# Altium PCB PCB1.PcbDoc
Units mm, origin at the board's own origin, x right, y up, seen from the top; angles counter-clockwise.
Board outline 56.5 x 48.5 mm, 2 copper layers (Top Layer, Bottom Layer); 33 components, 38 nets, 148 pads, 52 vias.
Unrouted connection lines stored in the file: 3.
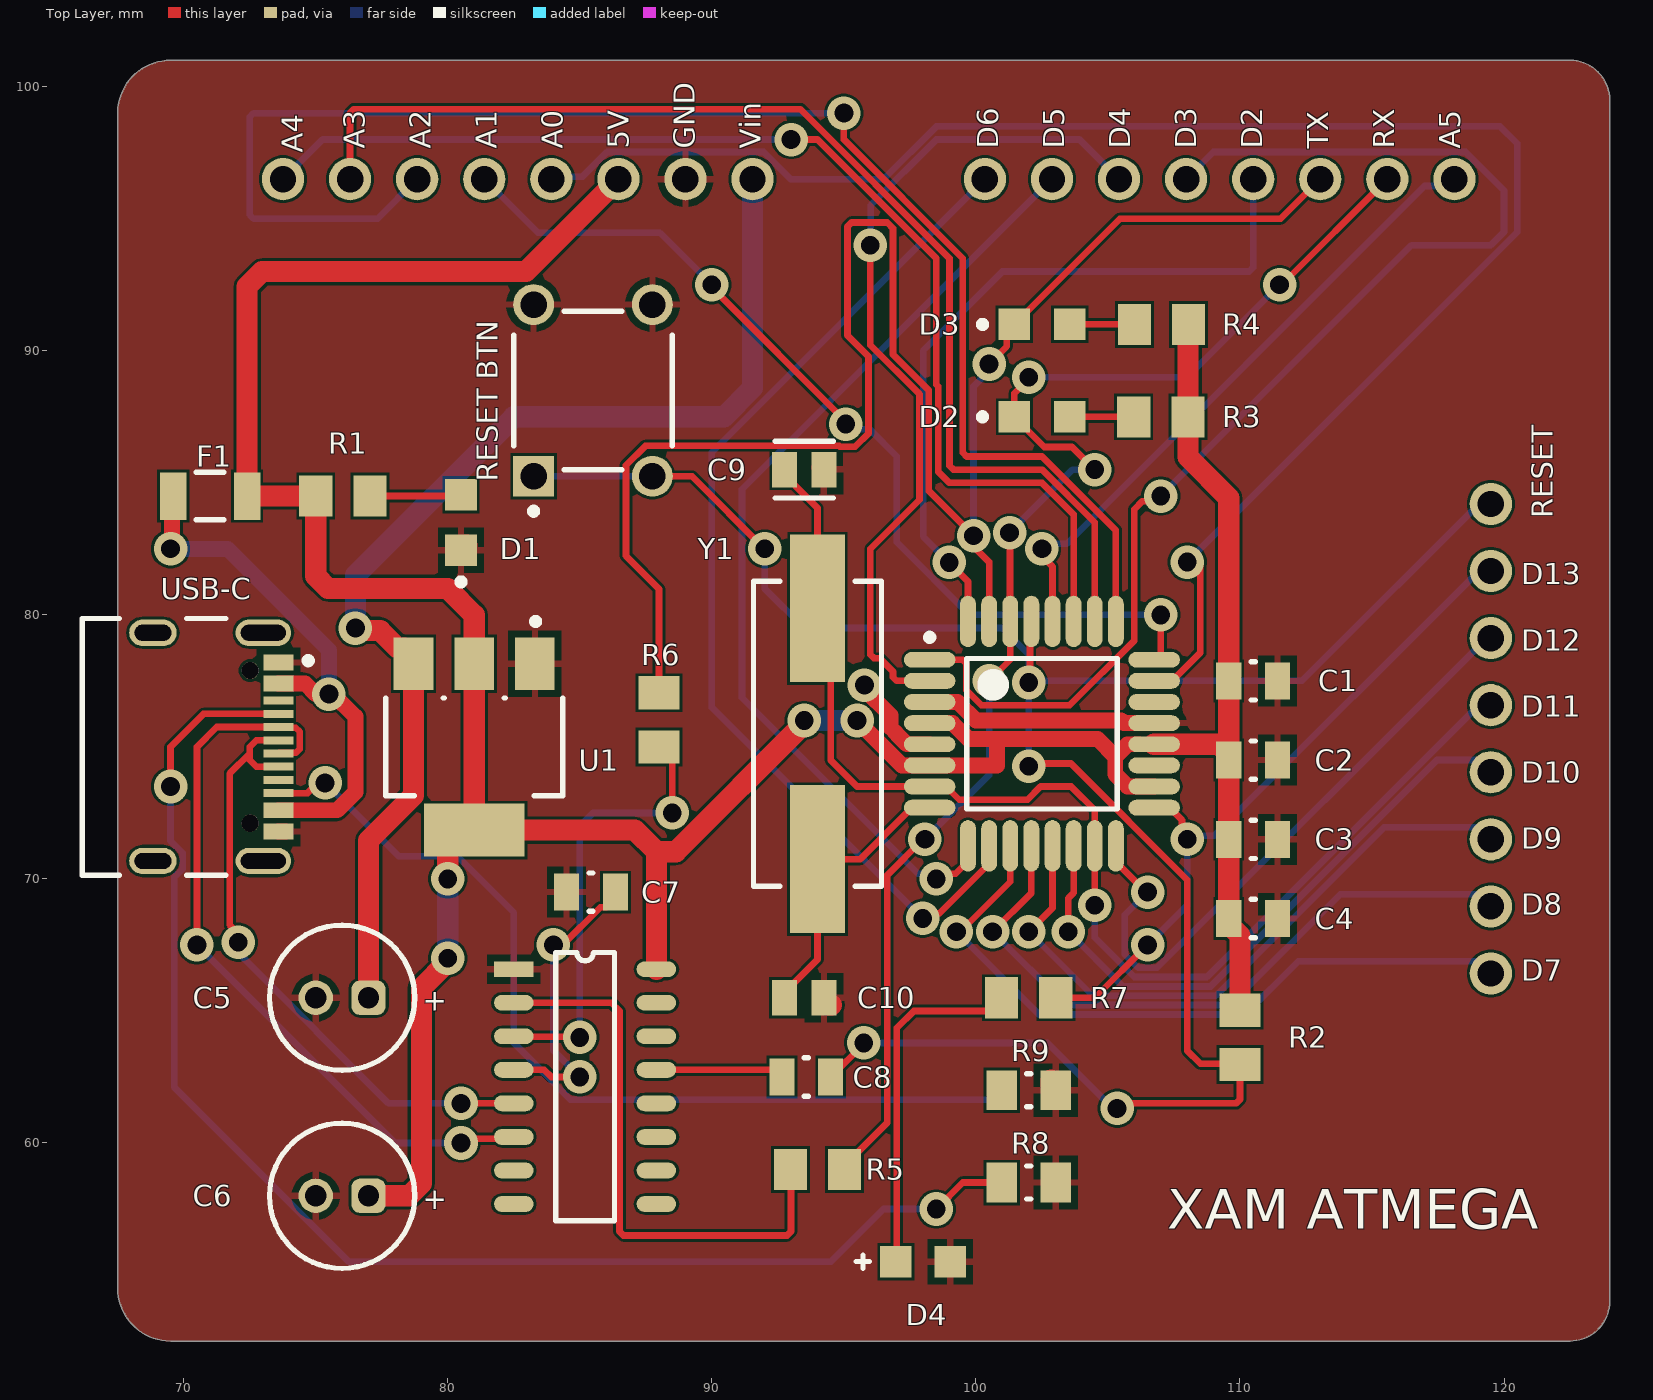
[diagram p0: Top Layer view]
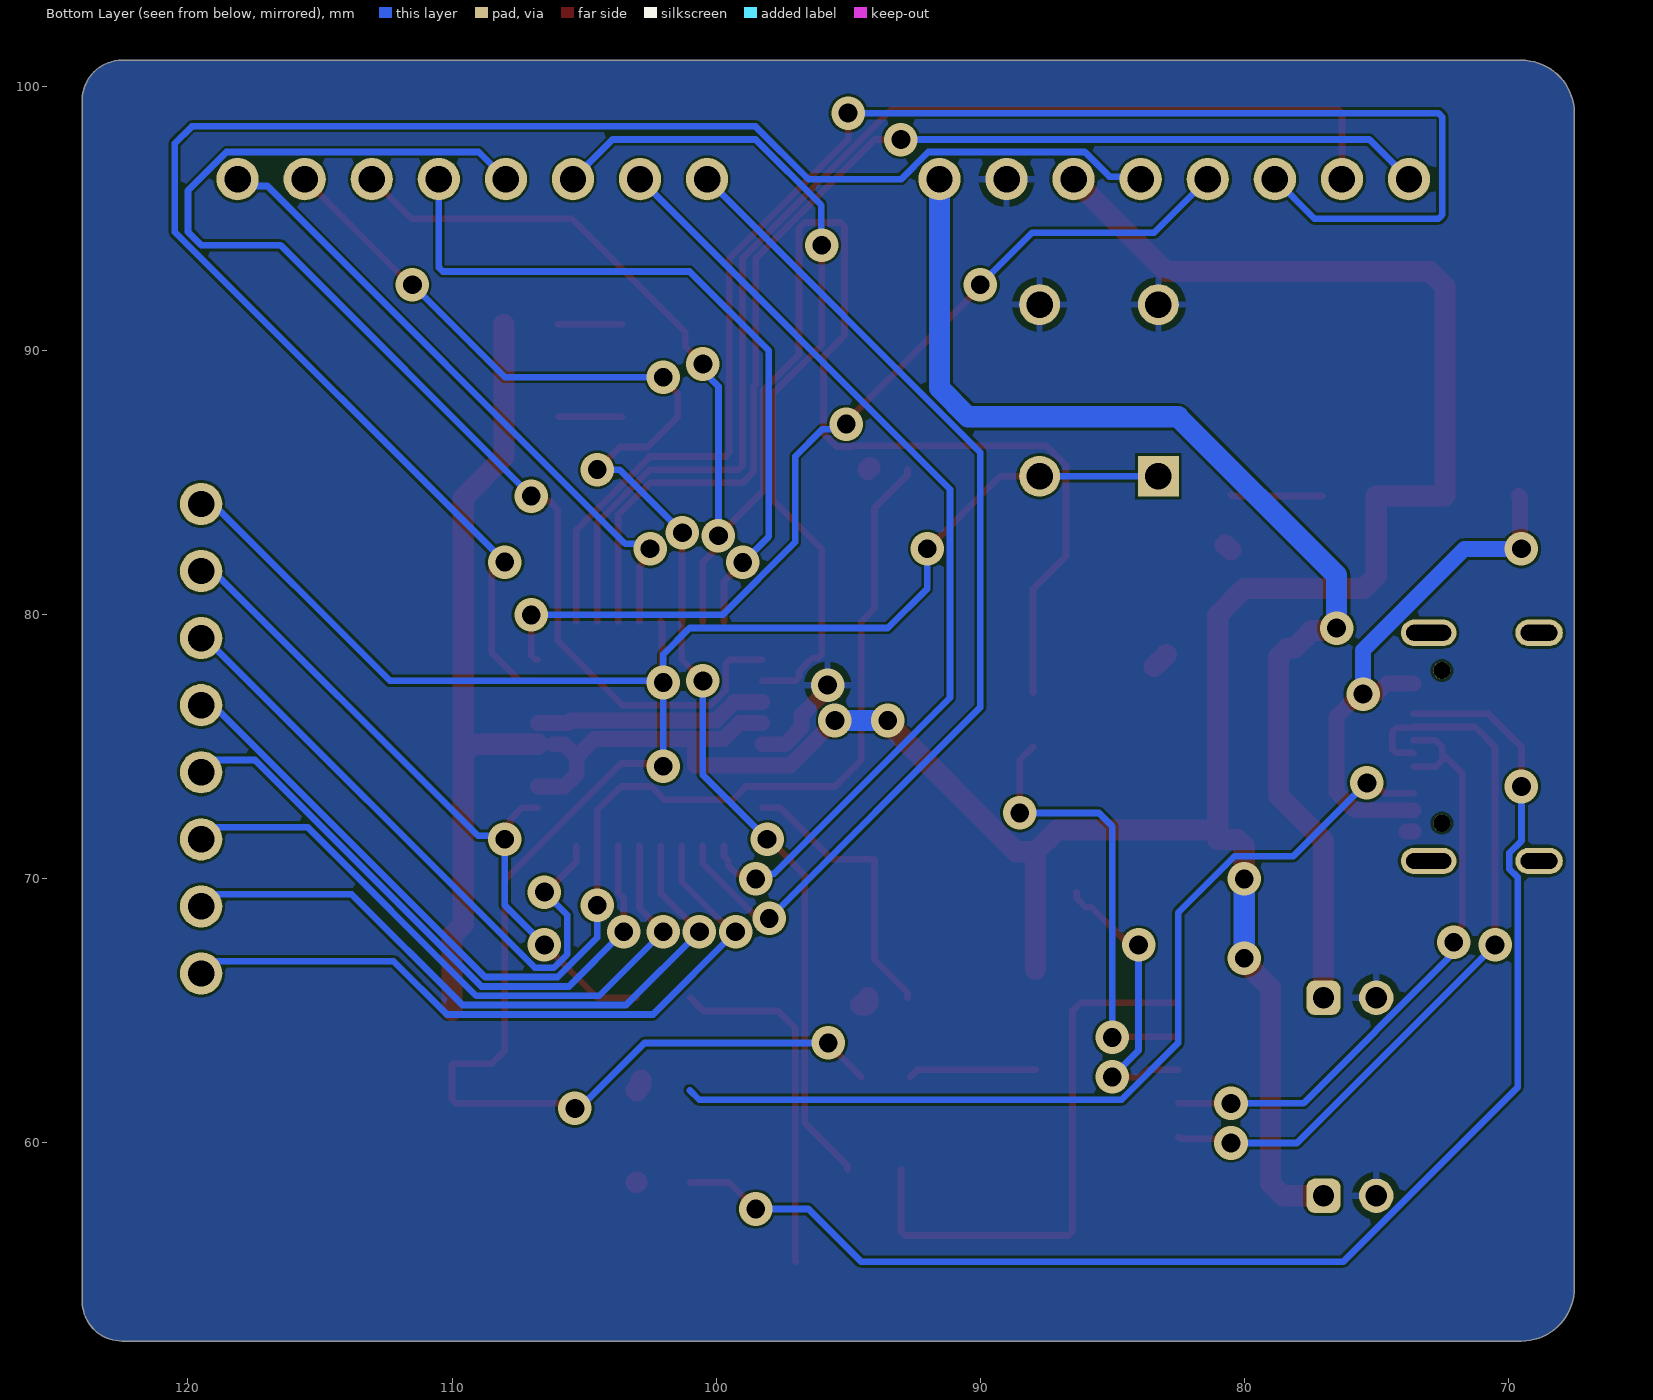
[diagram p1: Bottom Layer view, seen from below]
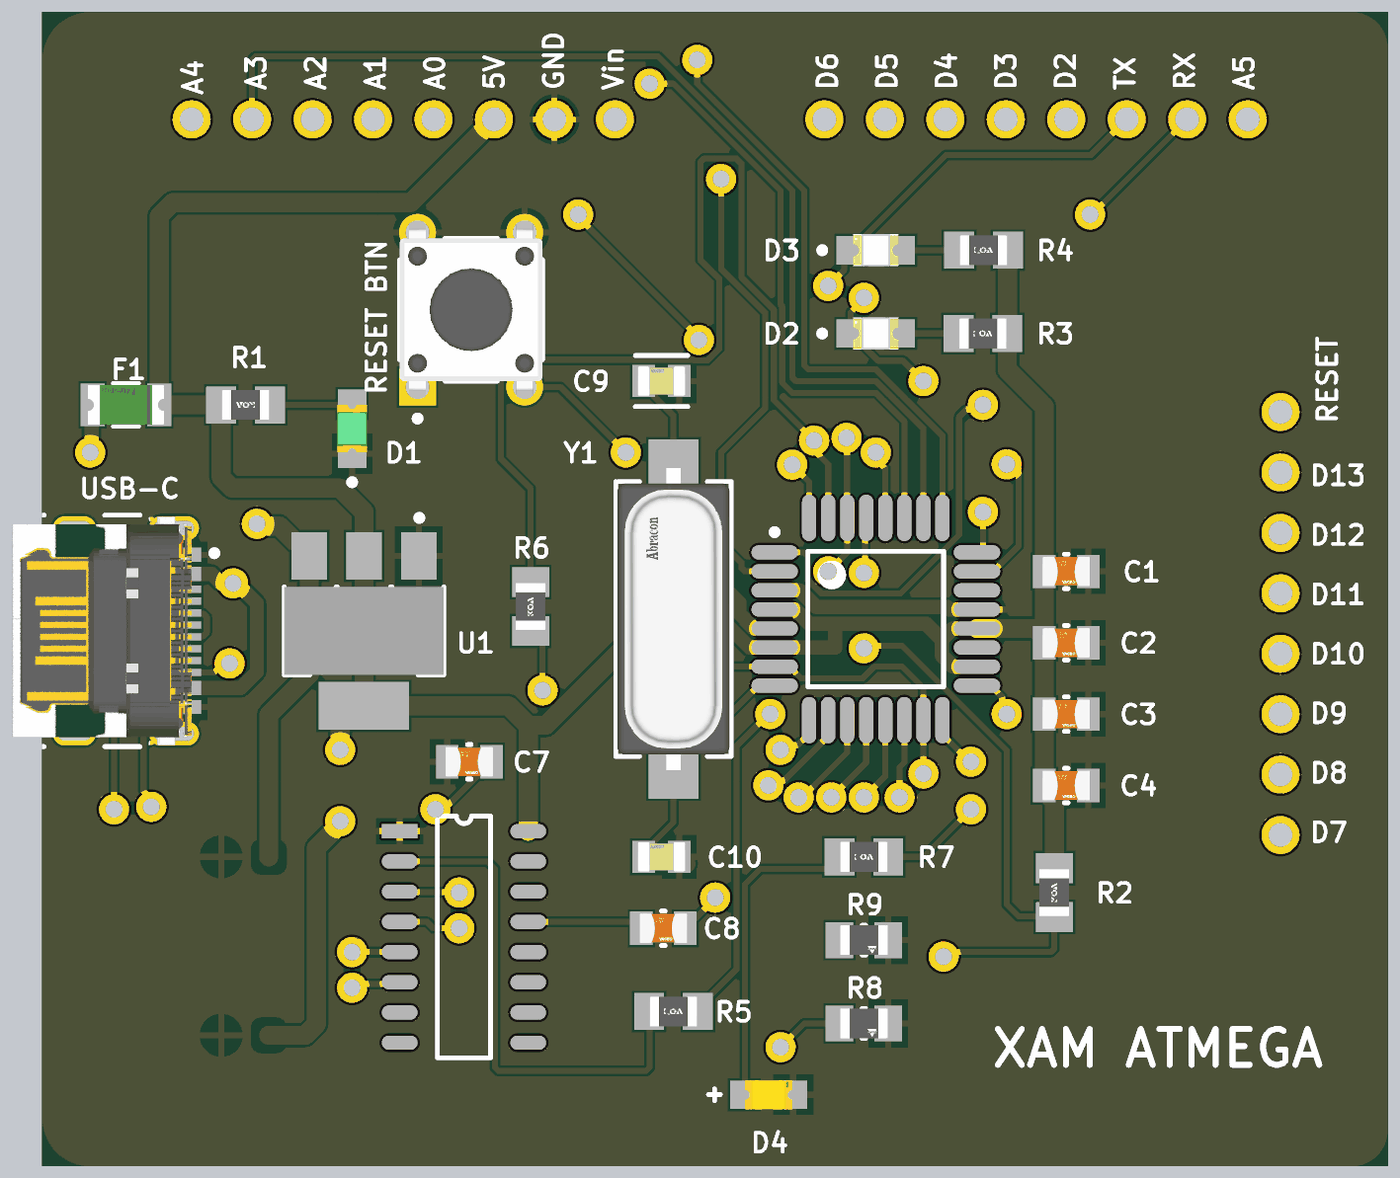
[diagram p2: 3D render of the assembled board from above, using the file's embedded part models]

## Layer stack, top to bottom
Top Solder: solder mask 0.0102, Solder Resist, Dk 3.5
Top Layer: signal copper 0.0356
Dielectric 1: dielectric 0.32, FR-4, Dk 4.8
Bottom Layer: signal copper 0.0356
Bottom Solder: solder mask 0.0102, Solder Resist, Dk 3.5

## Board outline
69.5,52.5 122.5,52.5 ccw(c122.5,54) 124,54 124,99.503 ccw(c122.5,99.5) 122.5,101 69.505,101 ccw(c69.5,99) 67.5,99 67.5,54.5 ccw(c69.5,54.5)

## Design rules (kind name [scope] priority, off if disabled: settings)
Clearance [All] p1: gap=0.1 ignorepadtopadclearanceinfootprint=FALSE
PolygonConnect [All] p1: connectstyle=Relief reliefconductorwidth=0.254 reliefentries=4 polygonreliefangle="90 Angle" airgapwidth=0.254
RoutingVias [All] p1: holewidth=0.711 width=1.27 viastyle="Through Hole" minholewidth=0.711 minwidth=1.27 maxholewidth=0.711 maxwidth=1.27
SolderMaskExpansion [All] p1: expansion=0.102 istentingtop=FALSE
SupplyNets "Schematic Supply Nets_1" [InNet('+5V')] p1: voltage=0.000
SupplyNets "Schematic Supply Nets" [InNet('GND')] p2: voltage=0.000
Width [All] p1: maxlimit=1.5 minlimit=0.2 preferedwidth=0.254 minimp=50.000000 maximp=50.000000 favimp=50.000000
30 further rules are at their usual default settings.

## Classes and differential pairs
component class atmega: C1 C2 C3 C4 C5 C6 C7 C8 C9 C10 D1 D2 D3 D4 F1 R1 R2 R3 R4 R5 R6 R8 R9 USB-C Y1

## Components (designator, comment, footprint, x,y, rotation, side; value= is the part's Value field where it differs from the comment)
*1 "CH340C" SOP16 82.5,66.58 r0 top
*2 "Header 1x8" Header2.54mm1x8 91.54,96.5 r90 top
*3 "Header 1x8" Header2.54mm1x8 118.12,96.5 r90 top
*4 "Header 1x8" Header2.54mm1x8 119.5,66.42 r0 top
C1 "100nF" FP-CC0805-0_85-MFG 110.5,77.5 r0 top value="100 nF"
C2 "100nF" FP-CC0805-0_85-MFG 110.5,74.5 r0 top value="100 nF"
C3 "100nF" FP-CC0805-0_85-MFG 110.5,71.5 r0 top value="100 nF"
C4 "100nF" FP-CC0805-0_85-MFG 110.5,68.5 r0 top value="100 nF"
C5 "860020472003" WCAP-ATG5_D5H11 1346,1335.5 r0 top
C6 "860020472003" WCAP-ATG5_D5H11 1346,1328 r0 top
C7 "100nF" FP-CC0805-0_85-MFG 85.425,69.5 r0 top value="100 nF"
C8 "100nF" FP-CC0805-0_85-MFG 93.575,62.5 r0 top value="100 nF"
C9 "22pF" FP-C0805C-DN-MFG 93.5,85.5 r0 top value="22 pF"
C10 "22pF" FP-C0805C-DN-MFG 93.5,65.5 r0 top value="22 pF"
D1 "LTST-C171GKT" FP-LTST-C171GKT-MFG 80.5,83.5 r90 top
D2 "LS R976-NR-1" FP-LS_R976-MFG 102.5,87.5 r0 top
D3 "LS R976-NR-1" FP-LS_R976-MFG 102.5,91 r0 top
D4 "SM0805YCL" FP-SM0805YCL-MFG 98,55.5 r0 top
F1 "1206L050YR" FP-1206L050YR-MFG 71,84.5 r180 top
R1 "1k" FP-RN73R2A-IPC_A 76.025,84.5 r180 top
R2 "10K" FP-RN73R2A-IPC_A 110,64 r90 top
R3 "1k" FP-RN73R2A-IPC_A 107,87.5 r0 top
R4 "1k" FP-RN73R2A-IPC_A 107.025,91 r0 top
R5 "1k" FP-RN73R2A-IPC_A 94,59 r0 top
R6 "1k" FP-RN73R2A-IPC_A 88,76.025 r90 top
R7 "1k" FP-RN73R2A-IPC_A 102,65.5 r0 top
R8 "5.1k" FP-MCU0805-IPC_A 102,58.5 r0 top
R9 "5.1k" FP-MCU0805-IPC_A 102,62 r0 top
"RESET BTN" "MJTP1230A" FP-MJTP1230A-MFG 85.5,88.5 r90 top (schematic designator SW1)
U1 "NCP1117ST50T3G" FP-318H-MFG 81,75 r270 top
U2 "ATmega328P-AU" 32A_M 102.5,75.5 r0 top
USB-C "USB4105-GF-A" FP-USB4105-GF-A-MFG 70,75 r270 top (schematic designator J1)
Y1 "ABLS-16.000MHZ-K4T" FP-ABLS-MFG 94,75.5 r90 top

## Footprints (in the part's own frame and the unit in brackets; to place one, negate y for a bottom-side part, rotate by r counter-clockwise, add the part's x,y. Pads: shape width x height; smd on the part's side, far side on the other; paste and mask are expansions set on the pad)
32A_M [mm] "Thin QFP, 32-Leads, Body 7x7mm, Pitch 0.8mm, IPC Low Density"
  oval 1.95x0.6 smd: 1(-4.25,2.8) 2(-4.25,2) 3(-4.25,1.2) 4(-4.25,0.4) 5(-4.25,-0.4) 6(-4.25,-1.2) 7(-4.25,-2) 8(-4.25,-2.8) 17(4.25,-2.8) 18(4.25,-2) 19(4.25,-1.2) 20(4.25,-0.4) 21(4.25,0.4) 22(4.25,1.2) 23(4.25,2) 24(4.25,2.8)
  oval 0.6x1.95 smd: 9(-2.8,-4.25) 10(-2,-4.25) 11(-1.2,-4.25) 12(-0.4,-4.25) 13(0.4,-4.25) 14(1.2,-4.25) 15(2,-4.25) 16(2.8,-4.25) 25(2.8,4.25) 26(2,4.25) 27(1.2,4.25) 28(0.4,4.25) 29(-0.4,4.25) 30(-1.2,4.25) 31(-2,4.25) 32(-2.8,4.25)
  silkscreen extent -4.37,-2.85 2.85,3.77, body extent -3.5,-3.5 3.5,3.5, height 1.2
FP-318H-MFG [mm]
  rect 2x1.5 smd paste+0 mask+0: 1(-3.15,2.3) 2(-3.15,0) 3(-3.15,-2.3)
  rect 2x3.8 smd paste+0 mask+0: 4(3.15,0)
  silkscreen extent -4.87,-3.35 1.85,3.35, body extent -4.25,-3.68 4.25,3.68, height 0.25
FP-1206L050YR-MFG [mm]
  rect 1x1.8 smd paste+0 mask+0: 1(-1.4,0) 2(1.4,0)
  silkscreen extent -0.53,-0.9 0.53,0.9, body extent -2,-1 2,1, height 0.25
FP-ABLS-MFG [mm]
  rect 5.6x2.1 smd paste+0 mask+0: 1(-4.75,0) 2(4.75,0)
  silkscreen extent -5.77,-2.42 5.77,2.42, body extent -7.65,-2.52 7.65,2.52, height 0.25
FP-C0805C-DN-MFG [mm]
  rect 0.95x1.35 smd paste+0 mask+0: 1(-0.75,0) 2(0.75,0)
  silkscreen extent -1.1,-1.07 1.1,1.07, body extent -1.4,-0.85 1.4,0.85, height 0.25
FP-CC0805-0_85-MFG [mm]
  rect 0.95x1.4 smd paste+0 mask+0: 1(-0.925,0) 2(0.925,0)
  silkscreen extent -0.08,-0.72 0.08,0.72, body extent -1.6,-1.05 1.6,1.05, height 0.25
FP-LS_R976-MFG [mm]
  rect 1.2x1.2 smd paste+0 mask+0: 1(-1.05,0) 2(1.05,0)
  silkscreen extent -2.37,-0.12 -2.12,0.12, body extent -1.75,-0.8 1.75,0.8, height 0.25
FP-LTST-C171GKT-MFG [mm]
  rect 1.2x1.2 smd paste+0 mask+0: 1(-1.05,0) 2(1.05,0)
  silkscreen extent -2.37,-0.13 -2.13,0.12, body extent -1.75,-0.77 1.75,0.77, height 0.25
FP-MCU0805-IPC_A [mm]
  rect 1.159x1.508 smd paste+0 mask+0: 1(-1.027,0) 2(1.027,0)
  silkscreen extent -0.07,-0.63 0.07,0.63, body extent -2.11,-1.25 2.11,1.25, height 0.25
FP-MJTP1230A-MFG [mm]
  rect 1.55x1.55 hole 1 paste-2539.97 mask+0: 1(-3.25,2.25)
  round 1.55 hole 1 paste-2539.97 mask+0: 2(3.25,2.25) 3(-3.25,-2.25) 4(3.25,-2.25)
  silkscreen extent -4.7,-3 3,3, body extent -4.13,-3.13 4.13,3.13, height 0.25
FP-RN73R2A-IPC_A [mm]
  rect 1.255x1.556 smd paste+0 mask+0: 1(-1.025,0) 2(1.025,0)
  body extent -2.15,-1.28 2.15,1.28, height 0.25
FP-SM0805YCL-MFG [mil]
  rect 47x47 smd paste+0 mask+0: 1(-40.5,0) 2(40.5,0)
  silkscreen extent -100,-10 -80,10, body extent -68,-33 68,33, height 10
FP-USB4105-GF-A-MFG [mm]
  rrect100% 1x2.1 hole 1.7 slot 0.6 at 0 deg paste-2539.97 mask+0: 1(-4.32,3.015) 2(4.32,3.015)
  rrect100% 1x1.8 hole 1.4 slot 0.6 at 0 deg paste-2539.97 mask+0: 3(-4.32,-1.165) 4(4.32,-1.165)
  rect 0.6x1.15 smd paste+0 mask+0: A1-B12(-3.2,3.59) A4-B9(-2.4,3.59) B1-A12(3.2,3.59) B4-A9(2.4,3.59)
  rect 0.3x1.15 smd paste+0 mask+0: A5(-1.25,3.59) A6(-0.25,3.59) A7(0.25,3.59) A8(1.25,3.59) B5(1.75,3.59) B6(0.75,3.59) B7(-0.75,3.59) B8(-1.75,3.59)
  round 0.65 hole 0.65 unplated paste-2539.97 mask+0: ""(-2.89,2.515) ""(2.89,2.515)
  silkscreen extent -4.86,-3.84 4.86,4.84, body extent -4.96,-3.94 4.96,4.27, height 0.25
Header2.54mm1x8 [mm]
  round 1.6 hole 1: 1(0,0) 2(0,2.54) 3(0,5.08) 4(0,7.62) 5(0,10.16) 6(0,12.7) 7(0,15.24) 8(0,17.78)
SOP16 [mm]
  rect 1.5x0.6 smd: 1(0,0)
  oval 1.5x0.6 smd: 2(0,-1.27) 3(0,-2.54) 4(0,-3.81) 5(0,-5.08) 6(0,-6.35) 7(0,-7.62) 8(0,-8.89) 9(5.4,-8.89) 10(5.4,-7.62) 11(5.4,-6.35) 12(5.4,-5.08) 13(5.4,-3.81) 14(5.4,-2.54) 15(5.4,-1.27) 16(5.4,0)
  silkscreen extent 1.58,-9.53 3.82,0.64
WCAP-ATG5_D5H11 [mm] "Aluminum Electrolytic Capacitors, 5x11mm"
  rrect50% 1.3x1.3 hole 0.8: 1(-1269,-1270)
  round 1.3 hole 0.8: 2(-1271,-1270)
  silkscreen extent -1272.75,-1272.75 -1267.25,-1267.25, body extent -1272.49,-1272.5 -1267.5,-1267.5, height 11.31

## Part data
C1 C2 C3 C4 C7 C8: library part CMP-2100-03606-3, "CAP CER 0.1UF 50V X7R 0805", Capacitance="100 nF", Manufacturer=Yageo, Manufacturer Part Number=CC0805KRX7R9BB104, Package=CC0805-0.85, Temperature="-30°C to +85°C", Temperature Characteristic=X7R, Temperature Range High=+85°C, Temperature Range Low=-30°C, Tolerance=0.1, Voltage Rating="50 V", Automotive=No, Category=Cap, ComponentLink2Description=Datasheet, ComponentLink2URL=http://www.yageo.com/documents/recent/UPY-GPHC_Y5V_6.3V-to-50V_8.pdf, Device Class L1="Passive Components", Device Class L2=Capacitors, Device Class L3="Ceramic Capacitors", Digikey Description="CAP CER 0.1UF 50V X7R 0805", Footprint Url=http://www.yageo.com/exep/pages/download/literatures/UPY-C_GEN_24.pdf, Height=0.95mm, Ipc Land Pattern Name=CAPC200125X85, Lead Free=Yes, Material=Ceramic, Mouser Description="Multilayer Ceramic Capacitors MLCC - SMD/SMT 100nF 50V X7R 10%", Octopart=https://octopart.com/cc0805krx7r9bb104-yageo-192993, RoHS=TRUE
C5 C6: library part CMP-03913-53914185-1, "860020472003 WCAP-ATG5 Aluminum Electrolytic Capacitors", Capacitance=10µF, Case/Package=Radial, Leakage Current=3µA, Max Operating Temperature=105°C, Min Operating Temperature=-40°C, Ripple Current=38mA, Tolerance=20%, Voltage Rating=25V, Diameter=5mm, Height - Seated (Max)=12.4968mm, Lead Pitch=2.0066mm, Length=11mm, Life (Hours)=2000hours, Mount="Through Hole", NexarPartId=53914185, Packaging="Tape & Box (TB)", Pitch=2mm, Polarity=Polar, RoHS=Compliant
C9 C10: library part CMP-03020-019421-1, "CAP CER SMD 0805 22PF 10% 50V X7", Capacitance="22 pF", Manufacturer=KEMET, Manufacturer Part Number=C0805C220K5RACAUTO, Package=C0805C-DN, Temperature="-55°C to +125°C", Temperature Characteristic=X7R, Temperature Coefficient=30ppm/°C, Temperature Range High=+125°C, Temperature Range Low=-55°C, Tolerance=0.1, Voltage Rating="50 V", Automotive=No, Category=Cap, ComponentLink2Description=Datasheet, ComponentLink2URL=https://content.kemet.com/datasheets/KEM_C1003_C0G_SMD.pdf, Device Class L1="Passive Components", Device Class L2=Capacitors, Device Class L3="Ceramic Capacitors", Digikey Description="CAP CER SMD 0805 22PF 10% 50V X7", Height=0.88mm, Ipc Land Pattern Name=CAPC200125X78, Lead Free=Yes, Material=Ceramic, Mouser Description="Cap Ceramic 22pF 50V X7R 10% SMD 0805 125°C Paper T/R", Octopart=https://octopart.com/c0805c220k5racauto-kemet-86504565, RoHS=TRUE
D1: library part CMP-22017-000007-1, "LED GREEN CLEAR CHIP SMD", Case Code (Imperial)=0805, Case Code (Metric)=2012, Color=Green, Forward Current=30mA, Forward Voltage=2.1V, Lens Color=Colorless, Max Operating Temperature=85°C, Min Operating Temperature=-55°C, Package Quantity=1, Power Dissipation=100mW, Reverse Voltage=5V, Test Current=10mA, Case/Package=0805, Depth=1.25mm, Dominant Wavelength=569nm, Height=0.8mm, Illumination Color=Green, Lead Free="Lead Free", Length=2mm, Lens Style=Diffused, Lens Transparency=Clear, Luminous Intensity=12mcd, Mount="Surface Mount", Number of Elements=1, Number of LEDs=1, Number of Pins=2, Packaging="Tape and Reel", Power Rating=100mW, Radiation Hardening=No, Viewing Angle=130°, Wavelength=585nm, Width=1.25mm
D2 D3: library part CMP-62016-000037-1, "LED RED DIFFUSED 0805 SMD", Case Code (Imperial)=0805, Case Code (Metric)=2012, Color=Red, Forward Current=25mA, Forward Voltage=2.5V, Lens Color=White, Max Operating Temperature=85°C, Min Operating Temperature=-30°C, Package Quantity=16000, Power Dissipation=65W, Reverse Voltage=12V, Test Current=20mA, Case/Package=0805, Depth=1.35mm, Dominant Wavelength=633nm, Height=0.9mm, Illumination Color=Red, Length=2mm, Lens Size=1.25mm, Lens Style=Flat, Lens Transparency=Diffused, Luminous Flux=0.47lm, Luminous Intensity=180mcd, Mount="Surface Mount", Number of Elements=1, Number of LEDs=1, Number of Pins=2, Packaging="Tape and Reel", Radiation Hardening=No, Viewing Angle=160°, Width=1.25mm
D4: library part CMP-35283-000007-1, "LED YELLOW CLEAR 0805 SMD", Case Code (Imperial)=0805, Case Code (Metric)=2012, Color=Yellow, Forward Current=2mA, Forward Voltage=1.9V, Lens Color=Colorless, Max Operating Temperature=80°C, Min Operating Temperature=-30°C, Package Quantity=4000, Case/Package=0805, Dominant Wavelength=592nm, Height=0.8mm, Illumination Color=Yellow, Lead Free="Lead Free", Length=2mm, Lens Transparency=Clear, Luminous Intensity=11.5mcd, Mount="Surface Mount", Packaging="Tape and Reel", Test Current=2mA, Viewing Angle=130°, Width=1.2mm
F1: library part CMP-08606-000073-1, "PTC RESET FUSE 6V 500MA 1206", Case Code (Imperial)=1206, Case Code (Metric)=3216, Current Rating=100A, Hold Current=500mA, Max Operating Temperature=85°C, Max Power Dissipation=600mW, Max Voltage Rating (DC)=6V, Min Operating Temperature=-40°C, Package Quantity=4000, Resistance=700mR, Trip Current=1A, Approvals=cULus, Case/Package=1206, Height=0.75mm, Lead Free="Lead Free", Length=3.4mm, Max Current Rating=100A, Operating Supply Voltage=6V, Packaging="Tape and Reel", Power Dissipation=600mW, REACH SVHC="No SVHC", RoHS Compliant=Yes, Series=1206L, Terminal Material=Copper, Termination=SMD/SMT, Time to Trip=0.1s, Voltage Rating=6V, Voltage Rating (DC)=6V, Width=1.8mm, Working Voltage=6V
R1 R3 R4 R5 R6 R7: library part CMP-04015-026717-1, "1kΩ ±0.1% 0.125W, 1/8W Chip Resistor 0805 (2012 Metric) Moisture Resistant Thin Film"
R2: library part CMP-04015-052084-1, "RES 10K OHM 0.1% 1/8W 0805"
R8 R9: library part CMP-02407-002872-1, "RES 1.05K OHM 0.5% 1/5W 0805"
"RESET BTN": library part CMP-47024-000004-1, "SWITCH TACTILE SPST-NO 0.05A 12V", Actuator Color=Black, Contact Resistance=100mR, Current Rating=50mA, Max Operating Temperature=70°C, Max Voltage Rating (DC)=12V, Min Operating Temperature=-20°C, Operating Force=160gf, Package Quantity=2000, Actuator Length=1.4mm, Actuator Material=Thermoplastic, Actuator Type=Standard, Color=Black, Contact Material=Bronze, Contact Plating=Silver, Electrical Life=100000Cycles, Illumination Type=Non-Illuminated, Mechanical Life=100000Cycles, Mount="Through Hole", Orientation=Straight, Packaging=Bulk, REACH SVHC="No SVHC", RoHS Compliant=Yes, Series=MJTP, Switch Function=Off-Mom, Switch Travel=0.25mm, Termination="PC Pin", Throw Configuration=SPST, Voltage Rating (DC)=12V
U1: library part CMP-0592-00001-4, "IC REG LINEAR 5V 1A SOT223", Case/Package=SOT-223, Dropout Voltage=1.2V, Input Bias Current=6mA, Max Input Voltage=20V, Max Operating Temperature=125°C, Max Output Current=1A, Min Input Voltage=3.5V, Min Operating Temperature=0°C, Nominal Output Voltage=5V, Output Voltage Accuracy=1%, Package Quantity=1, Power Rating=781mW, Quiescent Current=10mA, Accuracy=1%, Contact Plating=Tin, Halogen Free="Halogen Free", Height=1.69mm, Lead Free="Lead Free", Length=6.7mm, Min Current Limit=1A, Number of Outputs=1, Number of Pins=4, Number of Regulators=1, Output Current=1A, Output Type=Fixed, Output Voltage=5V, Packaging="Tape and Reel", Polarity=Positive, Radiation Hardening=No, REACH SVHC="No SVHC", RoHS Compliant=Yes, Tolerance=1%, Width=3.7mm
U2: library part CMP-0095-00269-2, "8-bit AVR Microcontroller, 32KB Flash, 1KB EEPROM, 2KB SRAM, 32-pin TQFP, Industrial Grade (-40°C to 85°C)", Code_JEDEC=MS-026-ABA, ComponentLink1Description="Manufacturer URL", ComponentLink1URL=http://www.atmel.com/, ComponentLink2Description="ATmega48A/48PA/88A/88PA/168A/168PA/328/328P Datasheet", ComponentLink2URL=http://www.atmel.com/dyn/resources/prod_documents/doc8271.pdf, ComponentLink3Description="ATmega48A/48PA/88A/88PA/168A/168PA/328/328P Summary", ComponentLink3URL=http://www.atmel.com/dyn/resources/prod_documents/8271S.pdf, DatasheetVersion="revD, May-2011", PackageDescription="32-Lead, 7x7x1.0 mm Body, 0.8mm Lead Pitch, Thin Profile Plastic Quad Flat Package (TQFP)", PackageReference=32A, PackageVersion="revC, Oct-2010", RevisionNote="DatasheetVersion & PackageVersion updated. URLs added."
USB-C: library part CMP-245163-000001-1, "CONN RCPT USB2.0 TYPEC 5A", Current Rating=5/6.25/1.25/0.25A, Manufacturer=GCT, Package=0, Temperature="-40°C to +85°C", Temperature Range High=+85°C, Temperature Range Low=-40°C, Voltage Rating=20V, Automotive=No, Category=Conn, ComponentLink2Description=Datasheet, ComponentLink2URL=https://gct.co/files/drawings/usb4105.pdf, Conn Orientation="Right Angle", Contact Material=Gold,Nickel, Device Class L1=Connectors, Device Class L2="USB Connectors", Device Class L3=unset, Digikey Description="CONN RCPT USB2.0 TYPEC 5A", Height=3.46mm, Is Female=yes, Lead Free=Yes, Manufacturer Part Number=USB4105-GF-A, Number Of Contacts=16, Octopart=https://octopart.com/usb4105-gf-a-gct-106627878, RoHS=TRUE, Usb Standard="USB 2.0"
Y1: library part CMP-27762-000003-1, "CRYSTAL 16.0000MHZ 18PF SMD", Frequency=16MHz, Load Capacitance=18pF, Manufacturer=Abracon, Package=ABLS, Temperature="-40°C to +125°C", Temperature Range High=+125°C, Temperature Range Low=-40°C, Tolerance=30ppm, Automotive=No, Category=Crys, ComponentLink2Description=Datasheet, ComponentLink2URL=https://abracon.com/Resonators/abls.pdf, Device Class L1="Passive Components", Device Class L2="Crystals / Oscillators", Device Class L3=Crystals, Digikey Description="CRYSTAL 16.0000MHZ 18PF SMD", Esr=40Ω, Height=4.3mm, Lead Free=Yes, Manufacturer Part Number=ABLS-16.000MHZ-K4T, Mouser Description="Crystal 16MHz ±30ppm (Tol) ±50ppm (Stability) 18pF FUND 40Ohm 2-Pin HC-49/US SMD T/R", Octopart=https://octopart.com/abls-16.000mhz-k4t-abracon-18618626, RoHS=TRUE, Series=ABLS, Stability=50ppm, Standoff Height=0mm

## Via types
v1: diameter 1.27, hole 0.711, Top Layer to Bottom Layer, 52 vias

## Nets (pads, with @x,y where several pads share a name; then routed paths per layer and width w, separated by ;. In a path a pad name is that pad's centre, name@x,y a point inside that pad or via, vN(x,y) a via of type N, cw(c..) or ccw(c..) an arc to the next point about the centre after c; other vN are vias at no path point)
+5V: *1.16 *2.3 C1.1 C2.1 C3.1 C4.1 C6.1 F1.1 R1.2 R2.2 R3.2 R4.2 U1.2 U1.4 U2.4 U2.6 U2.18 U2.20 | length 130.2
  Top Layer w0.6: v1(95.5,76) 95.5,75.995 97.195,74.3 U2.6 100.8,74.3 100.8,75.302 ; U2.4 99.115,75.9 99.713,75.302 100.8,75.302 ; U2.20@106.175,75.1 105.744,75.1 105.275,74.631 ; U2.18 105.744,73.5 105.275,73.969 105.275,74.631 ; 100.8,75.302 104.604,75.302 105.275,74.631
  Top Layer w0.8: C6.1 78.531,58 79,58.469 79,65.873 80,66.873 v1(80,67) ; v1(80,70) 80,71.25 80.25,71.5 81,71.5 U1.4 ; *2.3 82.96,93 72.969,93 72.4,92.431 F1.1 R1.2 75,81.469 75.469,81 80,81 81,80 U1.2 U1.4 ; *1.16 87.9,71.031 ; v1(93.5,76) 93.5,75.895 88.637,71.031 87.9,71.031 ; U2.20 109.2,75.1 109.575,74.725 C2.1 ; R4.2 108.038,90.987 108.038,87.513 R3.2 108.025,85.975 109.575,84.425 C1.1 C2.1 ; C4.1@109.575,68.275 110,67.85 R2.2 ; C4.1 C3.1 C2.1 ; U1.4 87.081,71.85 87.9,71.031
  Bottom Layer w0.8: v1(80,67) v1(80,70) v1@80,70.127 ; v1(93.5,76) v1(95.5,76)
+5V_USB: F1.2 USB-C.A4-B9 USB-C.B4-A9 | length 20.8
  Top Layer w0.6: v1(69.5,82.5) 69.55,82.55 69.55,84.45 F1.2 ; USB-C.B4-A9 75.815,72.6 76.5,73.285 76.5,76.149 75.649,77 75,77 74.6,77.4 USB-C.A4-B9
  Bottom Layer w0.6: v1(69.5,82.5) 71.658,82.5 75.5,78.658 v1(75.5,77)
A0: *2.4 U2.23 | length 65.6
  Top Layer w0.254: U2.23 107.425,77.5 108.5,78.575 108.5,81.851 108.149,81.851 v1(108,82)
  Bottom Layer w0.254: *2.4 84.013,96.593 85.101,96.593 86.035,97.527 91.965,97.527 93,96.492 96.492,96.492 98.5,98.5 119.851,98.5 120.5,97.851 120.5,94.5 v1(108,82)
A1: *2.5 U2.24 | length 36.3
  Top Layer w0.254: v1(90,92.5) 90,92.398 95.069,87.329 v1(95.069,87.227) ; U2.24 106.84,78.3 107,78.46 v1(107,80)
  Bottom Layer w0.254: *2.5 83.412,94.468 88.032,94.468 v1(90,92.5) ; v1(95.069,87.227) 95.263,87.033 95.967,87.033 97,86 97,82.755 99.755,80 v1(107,80)
A2: *2.6 U2.25 | length 58.5
  Top Layer w0.254: v1(95,99) 95,98 99.5,93.5 99.5,86.149 99.649,86 102.5,86 105.3,83.2 U2.25
  Bottom Layer w0.254: *2.6 77.34,95 72.649,95 72.5,95.149 72.5,98.851 72.649,99 v1(95,99)
A3: *2.7 U2.26 | length 45.6
  Top Layer w0.254: *2.7 76.3,99.002 76.449,99.151 93.348,99.151 99,93.499 99,85.648 99.149,85.5 102.5,85.5 104.5,83.499 U2.26
A4: *2.8 U2.27 | length 45.2
  Top Layer w0.254: v1(93,98) 93.999,98 98.5,93.499 98.5,88.72 98.57,88.65 98.57,85.43 99.001,84.999 102.499,84.999 103.7,83.799 U2.27
  Bottom Layer w0.254: *2.8 75.26,98 v1(93,98)
A5: *3.1 U2.28 | length 24.3
  Top Layer w0.254: v1(102.5,82.5) 102.5,82.225 102.9,81.825 U2.28
  Bottom Layer w0.254: v1(102.5,82.5) 102.694,82.694 103.442,82.694 116.99,96.242 117.862,96.242 *3.1
D2: *3.4 U2.32 | length 28.1
  Top Layer w0.254: v1(98.988,81.986) 98.988,81.974 99.7,81.262 U2.32
  Bottom Layer w0.254: v1(98.988,81.986) 98,82.974 98,90 101,93 110.351,93 110.5,93.149 *3.4
D3: *3.5 U2.1 | length 48
  Top Layer w0.254: U2.1 99.489,78.3 99.638,78.151 99.638,77.143 100.205,76.576 101.583,76.576 103.546,76.576 106,79.03 106,84 106.306,84.306 106.806,84.306 v1(107,84.5)
  Bottom Layer w0.254: v1(107,84.5) 116.5,94 119.499,94 120,94.501 120,96.072 118.545,97.527 108.987,97.527 *3.5
D4: *3.6 U2.2 | length 32.4
  Top Layer w0.254: v1(96,93.995) 96,90.219 97.862,88.357 97.862,84.36 96,82.498 96,78.5 96.138,78.362 96.357,78.362 96.862,77.857 96.862,77.638 97,77.5 U2.2
  Bottom Layer w0.254: v1(96,93.995) 96.017,94.012 96.017,95.516 98.501,98 103.92,98 *3.6
D5: *3.7 U2.9 | length 36.8
  Top Layer w0.254: v1(98.5,70) 98.694,70.194 99.226,70.194 99.54,70.509 99.54,70.702 99.7,70.862 U2.9
  Bottom Layer w0.254: v1(98.5,70) 98.306,70.194 97.806,70.194 91.138,76.862 91.138,80.81 91.138,84.758 *3.7
D6: *3.8 U2.10 | length 39.6
  Top Layer w0.254: v1(97.987,68.505) 98.181,68.7 98.625,68.7 100.5,70.575 U2.10
  Bottom Layer w0.254: v1(97.987,68.505) 90,76.492 90,86.16 *3.8
D7: *4.1 U2.11 | length 26.6
  Top Layer w0.254: v1(99.26,68) 99.406,68 101.3,69.894 U2.11
  Bottom Layer w0.254: v1(99.26,68) 102.392,64.868 110.193,64.868 112.205,66.88 *4.1@119.5,66.88
D8: *4.2 U2.12 | length 25.6
  Top Layer w0.254: v1(100.63,68) 102.1,69.47 U2.12
  Bottom Layer w0.254: v1(100.63,68) 103.408,65.222 109.608,65.222 113.806,69.42 *4.2@119.5,69.42
D9: *4.3 U2.13 | length 24.8
  Top Layer w0.254: v1(102,68) 102.9,68.9 U2.13
  Bottom Layer w0.254: v1(102,68) 104.424,65.576 109.088,65.576 115.472,71.96 *4.3@119.5,71.96
D10: *4.4 U2.14 | length 23.7
  Top Layer w0.254: v1(103.5,68) 103.5,69.273 103.7,69.473 U2.14
  Bottom Layer w0.254: v1(103.5,68) 105.57,65.93 108.891,65.93 117.461,74.5 *4.4@119.5,74.5
D11: *4.5 C9.1 U2.7 U2.15 Y1.2 | length 47.8
  Top Layer w0.254: C9.1 92.75,85.3 94,84.05 Y1.2 94.5,79.75 94.5,74.5 95.5,73.5 98.87,73.5 99.37,73 101.952,73 102.452,73.5 103.606,73.5 104.5,72.606 U2.15 v1(104.5,69)
  Bottom Layer w0.254: v1(104.5,69) 104.5,67.78 105.996,66.284 108.744,66.284 *4.5@119.5,77.04
D12: *4.6 U2.16 | length 24.6
  Top Layer w0.254: U2.16 105.3,70.637 106.438,69.5 v1(106.5,69.5)
  Bottom Layer w0.254: v1(106.5,69.5) 105.638,68.638 105.638,67.143 106.143,66.638 106.857,66.638 119.5,79.281 *4.6@119.5,79.58
D13: *4.7 R7.2 U2.17 | length 26.9
  Top Layer w0.254: R7.2 104.5,65.5 v1(106.5,67.5) ; U2.17 107.331,72.7 107.806,72.226 107.806,71.694 v1(108,71.5)
  Bottom Layer w0.254: v1(106.5,67.5) 108,69 v1(108,71.5) 108.136,71.636 109.016,71.636 *4.7@119.5,82.12
GND: "RESET BTN.2" "RESET BTN.4" *1.1 *2.2 C1.2 C2.2 C3.2 C4.2 C5.2 C6.2 C7.1 C9.2 C10.2 D1.1 D4.2 R8.2 R9.2 U1.1 U2.3 U2.5 U2.21 USB-C.A1-B12 USB-C.B1-A12 | length 15
  Top Layer w0.6: USB-C.B1-A12 USB-C.B1-A12@73.865,71.8 ; v1(95.777,77.342) 95.777,77.187 96.767,76.197 96.767,75.733 97,75.5 ; 97,75.485 97.385,75.1 U2.5 ; U2.3 99.305,76.7 100.002,76.002 105.498,76.002 105.6,75.9 U2.21
  Top Layer w0.8: D1.1 80.7,82.65 D1.1@80.725,82.65 ; U1.1@82.95,78.5 U1.1 U1.1@83.41,78.04 ; C9.2@94.175,85.575 C9.2 ; C10.2 94.25,65.3 94.325,65.225 C10.2@94.525,65.225 ; R9.2@102.847,62.384 102.847,62.179 R9.2 R9.2@103,61.973 ; R8.2@103,58.527 R8.2
Net*1_2: *1.2 R5.1 | length 21.5
  Top Layer w0.254: *1.2 86.19,65.31 86.5,65 86.5,56.649 86.649,56.5 92.851,56.5 93,56.649 93,58.975 R5.1
Net*1_3: *1.3 R6.1 | length 16.9
  Top Layer w0.254: *1.3 82.52,64.02 84.98,64.02 v1(85,64) ; R6.1 88.5,74.5 v1(88.5,72.5)
  Bottom Layer w0.254: v1(85,64) 85,72 85.5,72.5 v1(88.5,72.5)
Net*1_4: *1.4 C7.2 | length 11.3
  Top Layer w0.254: *1.4 83.652,62.77 83.922,62.5 v1(85,62.5) ; v1(84,67.5) 84.35,67.5 85.777,68.927 86.002,68.927 86.35,69.275 C7.2
  Bottom Layer w0.254: v1(84,67.5) 84,63.5 v1(85,62.5)
Net*1_13: *1.13 C8.1 | length 4.9
  Top Layer w0.254: *1.13 92.38,62.77 C8.1
NetC10_1: C10.1 U2.8 Y1.1 | length 10.8
  Top Layer w0.254: C10.1 92.75,65.7 94,66.95 Y1.1 95.625,70.75 97.575,72.7 U2.8
NetD1_2: D1.2 R1.1 | length 3.5
  Top Layer w0.254: R1.1 80.45,84.5 D1.2
NetD2_2: D2.2 R3.1 | length 2.4
  Top Layer w0.254: D2.2 R3.1
NetD3_2: D3.2 R4.1 | length 2.4
  Top Layer w0.254: D3.2 R4.1
NetD4_1: D4.1 R7.1 | length 13.3
  Top Layer w0.254: D4.1 97,55.529 97,64.351 97.649,65 100.475,65 R7.1
NetJ1_A5: R8.1 USB-C.A5 | length 53.1
  Top Layer w0.254: v1(69.5,73.5) 69.5,75 70.75,76.25 USB-C.A5 ; v1(98.5,57.5) 99.5,58.5 R8.1
  Bottom Layer w0.254: v1(69.5,73.5) 69.5,71.443 69.962,70.981 69.962,70.379 69.638,70.055 69.638,62.122 76.26,55.5 94.5,55.5 96.5,57.5 v1(98.5,57.5)
NetJ1_B5: R9.1 USB-C.B5 | length 35.6
  Top Layer w0.254: USB-C.B5 74.694,73.25 75.079,73.635 v1(75.354,73.635)
  Bottom Layer w0.254: v1(75.354,73.635) 75.365,73.635 78.138,70.862 80.357,70.862 82.5,68.719 82.5,63.781 84.643,61.638 100.638,61.638 101,62
RESET: "RESET BTN.1" "RESET BTN.3" *4.8 C8.2 R2.1 U2.29 | length 84.6
  Top Layer w0.254: 87.75,85.25 89.25,85.25 v1(92,82.5) ; C8.2 95.754,63.754 v1(95.754,63.79) ; v1(102,74.267) 102.106,74.373 103.597,74.373 108,69.97 108,63.5 108.5,63 109.975,63 R2.1 110,61.649 109.851,61.5 105.537,61.5 v1(105.348,61.31) ; v1(102,77.438) 102.05,77.488 102.05,79.7 U2.29
  Bottom Layer w0.254: 83.25,85.25 87.75,85.25 ; v1(92,82.5) 92,81 93.5,79.5 101,79.5 102,78.5 v1@102,77.5 ; v1(95.754,63.79) 102.71,63.79 105.19,61.31 v1(105.348,61.31) ; v1(102,74.267) v1(102,77.438) v1@102,77.5 ; *4.8@119.5,84.66 112.34,77.5 v1@102,77.5
RXMCU: *3.2 D2.1 R5.2 U2.30 | length 53.3
  Top Layer w0.254: R5.2 95.025,59.15 96.646,60.771 96.646,70.146 98.007,71.507 v1(98.067,71.507) ; v1(100.5,77.5) 101.3,78.3 U2.30 101.287,79.763 101.287,83.1 v1(101.275,83.113) ; v1(102,89) 102,88.932 101.45,88.382 D2.1 102.589,86.361 103.639,86.361 v1(104.5,85.5) ; v1(111.5,92.5) 111.58,92.5 *3.2
  Bottom Layer w0.254: v1(98.067,71.507) 100.5,73.939 v1(100.5,77.5) ; v1(101.275,83.113) 103.662,85.5 v1(104.5,85.5) ; v1(102,89) 108,89 v1(111.5,92.5)
TXMCU: *3.3 D3.1 R6.2 U2.31 | length 67.9
  Top Layer w0.254: R6.2 88,80.982 86.748,82.234 86.748,85.665 87.485,86.402 94.819,86.402 94.856,86.365 95.426,86.365 95.931,86.87 95.931,89.788 95.138,90.58 95.138,94.708 95.287,94.857 96.641,94.857 96.862,94.636 96.862,89.858 98.216,88.504 98.216,84.693 v1(99.909,83) 99.81,82.901 99.81,82.69 100.5,82 U2.31 ; v1(100.5,89.5) 101.168,90.168 101.168,90.718 D3.1 105.45,95 111.54,95 *3.3
  Bottom Layer w0.254: v1(99.909,83) 99.909,88.654 100.5,89.245 v1(100.5,89.5)
USB_data_n: *1.6 USB-C.A7 USB-C.B7 | length 28.5
  Top Layer w0.254: v1(70.5,67.5) 70.5,75 71.25,75.75 USB-C.B7 73.613,75.727 74.243,75.727 74.392,75.578 74.392,74.922 74.243,74.773 73.613,74.773 USB-C.A7 ; v1(80.5,60) 80.664,60.164 82.434,60.164 *1.6
  Bottom Layer w0.254: v1(70.5,67.5) 78,60 v1(80.5,60)
USB_data_p: *1.5 USB-C.A6 USB-C.B6 | length 23.7
  Top Layer w0.254: v1(72.064,67.605) 72.064,67.936 71.738,68.262 71.738,73.988 72.5,74.75 ; USB-C.B6 72.75,74.25 72.5,74.5 72.5,74.75 ; USB-C.A6 72.75,75.25 72.5,75 72.5,74.75 ; v1(80.5,61.5) *1.5
  Bottom Layer w0.254: v1(72.064,67.605) 72.259,67.411 72.259,67.001 77.76,61.5 v1(80.5,61.5)
Vin: *2.1 C5.1 U1.3 | length 44.1
  Top Layer w0.8: v1(76.5,79.5) 76.59,79.41 77.44,79.41 78.1,78.75 78.35,78.75 78.7,78.4 U1.3 78.7,73.157 77,71.457 C5.1
  Bottom Layer w0.8: v1(76.5,79.5) 76.5,81.5 82.5,87.5 90.453,87.5 91.54,88.587 *2.1
pads on no net: *1.7 *1.8 *1.9 *1.10 *1.11 *1.12 *1.14 *1.15 U2.19 U2.22 USB-C. USB-C.1 USB-C.2 USB-C.3 USB-C.4 USB-C.A8 USB-C.B8

## Polygon pours and split planes (outlines as drawn)
GND on Bottom Layer "GND_L02_P003" (solid, pour order 3): 69.505,101 122.5,101 cw(c122.5,99.5) 124,99.5 124,54 cw(c122.5,54) 122.5,52.5 69.5,52.5 cw(c69.5,54.5) 67.5,54.5 67.5,98.995 cw(c69.505,98.995)
GND on Top Layer "GND_L01_P002" (solid, pour order 2): 69.5,101 122.5,101 cw(c122.5,99.5) 124,99.5 124,54 cw(c122.5,54) 122.5,52.5 69.5,52.5 cw(c69.5,54.5) 67.5,54.5 67.5,99 cw(c69.5,99)

## Silkscreen, mask and mechanical layers (free items; w line width, h text height)
Top Overlay:
  text "A3" at 76.85,97.65 h0.8 r90
  text "A2" at 79.35,97.65 h0.8 r90
  text "A1" at 81.85,97.65 h0.8 r90
  text "A0" at 84.35,97.65 h0.8 r90
  text "5V" at 86.85,97.65 h0.8 r90
  text "GND" at 89.35,97.65 h0.8 r90
  text "Vin" at 91.85,97.65 h0.8 r90
  text "D6" at 100.85,97.65 h0.8 r90
  text "D5" at 103.35,97.65 h0.8 r90
  text "D4" at 105.85,97.65 h0.8 r90
  text "D3" at 108.35,97.65 h0.8 r90
  text "D2" at 110.85,97.65 h0.8 r90
  text "TX" at 113.35,97.65 h0.8 r90
  text "RX" at 115.85,97.65 h0.8 r90
  text "A5" at 118.35,97.65 h0.8 r90
  text "A4" at 74.5,97.5 h0.8 r90
  text "RESET" at 121.85,83.65 h0.8 r90
  text "D13" at 120.65,81.15 h0.8
  text "D12" at 120.65,78.65 h0.8
  text "D11" at 120.65,76.15 h0.8
  text "D10" at 120.65,73.65 h0.8
  text "D9" at 120.65,71.15 h0.8
  text "D8" at 120.65,68.65 h0.8
  text "D7" at 120.65,66.15 h0.8
  text "XAM ATMEGA" at 107.25,56.75 h1.5

## Text inside footprints (layer, text, board x,y; h text height)
C5: Top Overlay "+" at 79.05,65 h0.8
C6: Top Overlay "+" at 79.05,57.5 h0.8